# Altium PCB EXP_V111.PcbDoc (part 4 of 4)
Units mm, origin at the board's own origin, x right, y up, seen from the top; angles counter-clockwise.
Board outline 86 x 86 mm, 4 copper layers (Top Layer, Mid-Layer 1, Mid-Layer 2, Bottom Layer), stack 1.584 mm thick; 341 components, 287 nets, 1185 pads, 999 vias.
Unrouted connection lines stored in the file: 255.
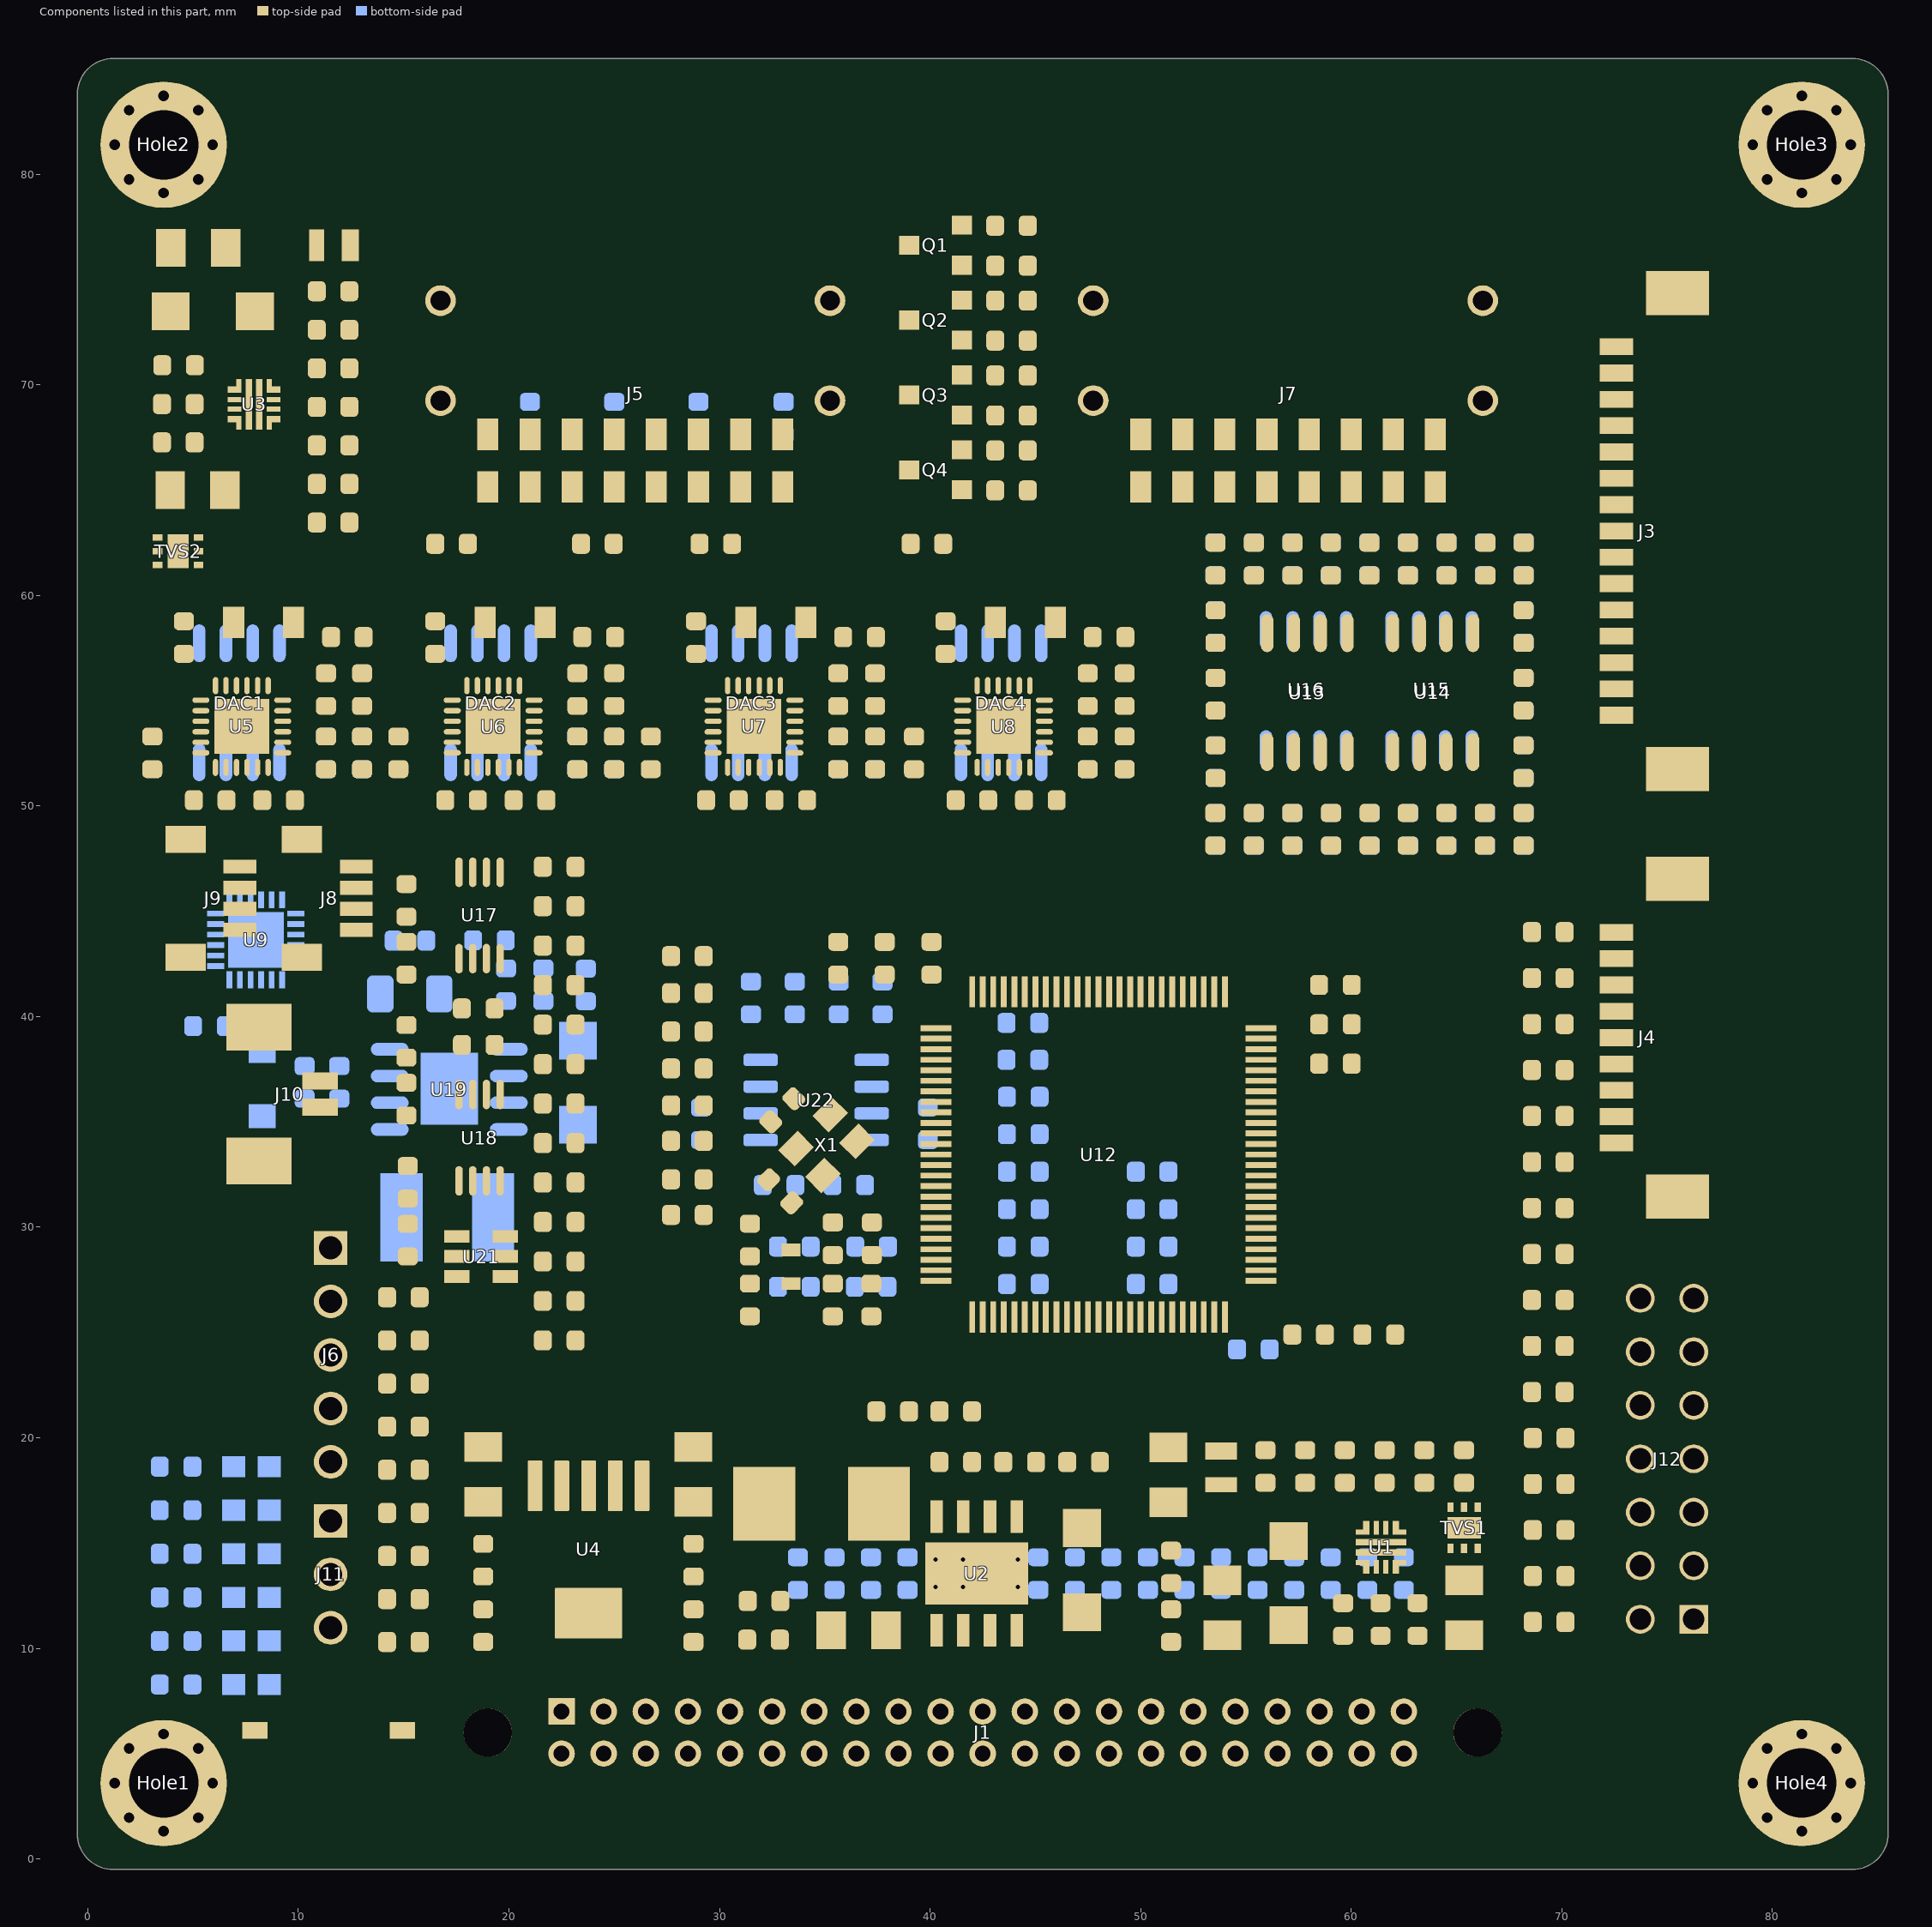
[diagram p6: the components of this part, seen from the top]

## Other copper (continued)
Bottom Layer:
  region net NetD4_2: 18.241,31.186 18.241,32.575 21.533,32.575 21.533,34.303 19.08,34.317 19.08,36.198 24.157,36.192 24.157,33.951 24.157,31.186
  region net IR_LED_P: 11.944,38.071 7.633,38.071 7.633,36.881 11.944,36.881
  region net NetC123_1: 7.632,36.519 12.542,36.519 12.542,32.579 15.902,32.579 15.902,30.472 13.895,30.472 13.895,31.488 11.387,31.488 11.387,35.3 7.632,35.3
  region net PROTECT_EMI: 1.2,83.8 1.197,83.796 1.197,83.044 1.936,83.784 1.936,83.798
  region net PROTECT_EMI: 83.8,83.8 83.796,83.803 83.044,83.803 83.784,83.064 83.798,83.064
  region net PROTECT_EMI: 83.8,1.2 83.803,1.204 83.803,1.956 83.064,1.216 83.064,1.202
  region net PROTECT_EMI: 1.2,1.2 1.204,1.197 1.956,1.197 1.216,1.936 1.202,1.936

## Silkscreen, mask and mechanical layers (free items; w line width, h text height)
Top Overlay:
  text "SCL" at 2.402,48.733 h0.55 r270
  text "SDA" at 2.402,46.733 h0.55 r270
  text "VCC" at 2.388,44.733 h0.55 r270
  text "GND" at 2.411,42.733 h0.55 r270
  text "LED_P" at 2.529,39.104 h0.55 r270
  text "LED_N" at 2.529,35.846 h0.55 r270
  text "VCC" at 3.377,27.538 h0.55
  text "GND" at 3.325,25.016 h0.55
  text "5s/30s" at 17.53,22.73 h0.55
  text "SWDIO" at 2.855,22.493 h0.55
  text "SWCLK" at 2.905,19.971 h0.55
  text "NRST" at 3.144,17.448 h0.55
  text "RX" at 3.833,14.509 h0.55
  text "TX" at 3.757,11.907 h0.55
  text "GND" at 3.47,9.305 h0.55
Bottom Overlay:
  drawing of 17 lines, arcs and shapes, not listed
  text "EXP_V.1.1.0" at 49.021,77.236 h1.5
  text "G" at 2.531,18.788 h0.55 r90
  text "B" at 2.531,16.719 h0.55 r90
  text "3V3" at 2.531,15.2 h0.55 r90
  text "5V_T" at 2.49,13.378 h0.55 r90
  text "5V" at 2.531,10.786 h0.55 r90
  text "12V" at 2.531,8.946 h0.55 r90
Top Solder:
  region: 83.781,1.622 83.781,1.219 83.78,1.217 83.377,1.217
  region: 1.219,83.125 1.219,83.781 1.221,83.782 1.876,83.782
  region: 82.843,83.781 83.781,83.781 83.783,83.779 83.783,82.841
  region: 1.219,1.626 1.219,1.219 1.221,1.217 1.624,1.217 1.626,1.219
Bottom Solder:
  rectangle: 1.223,83.312 1.6,83.8
  rectangle: 1.086,1.2 1.956,1.6
  rectangle: 83.088,1.2 83.8,1.678
  rectangle: 83.287,83.363 83.804,83.803

## Text inside footprints (layer, text, board x,y; h text height)
U5: Top 3D Body "*" at 9.166,52.91 h1.27 r180
U6: Top 3D Body "*" at 21.104,52.91 h1.27 r180
U7: Top 3D Body "*" at 33.491,52.91 h1.27 r180
U8: Top 3D Body "*" at 45.342,52.91 h1.27 r180
U9: Bottom 3D Body "*" at 6.886,45.077 h0.64
U12: Top 3D Body "*" at 40.964,39.065 h1.27